# Altium PCB HalfBridgeDriverBoard.PcbDoc
Units mil, origin at the board's own origin, x right, y up, seen from the top; angles counter-clockwise.
Board outline 1900 x 2000 mil, 2 copper layers (Top Layer, Bottom Layer); 37 components, 22 nets, 126 pads, 49 vias.
Unrouted connection lines stored in the file: 6.
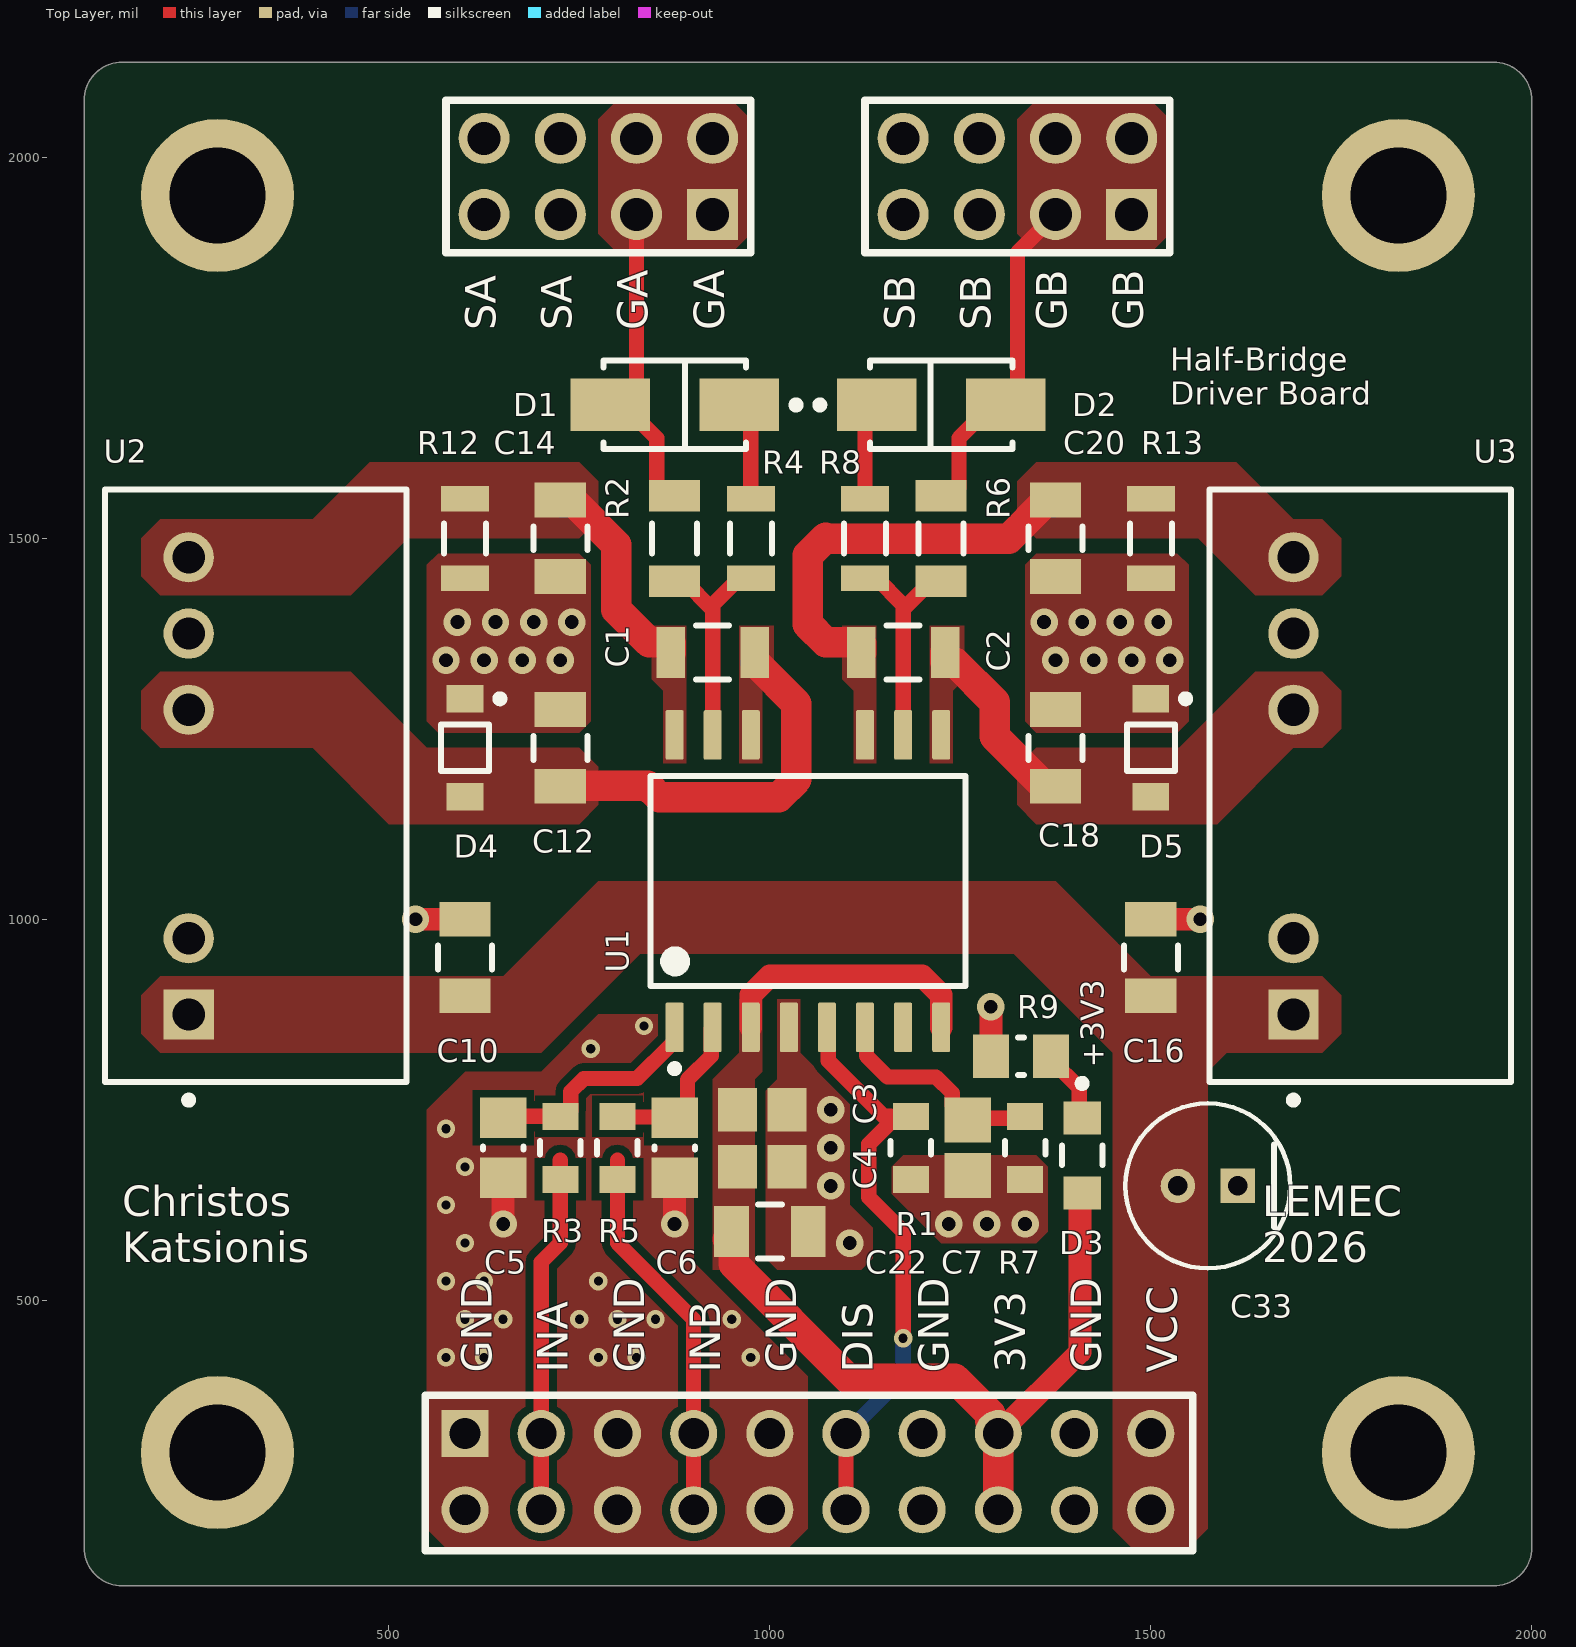
[diagram p0: Top Layer view]
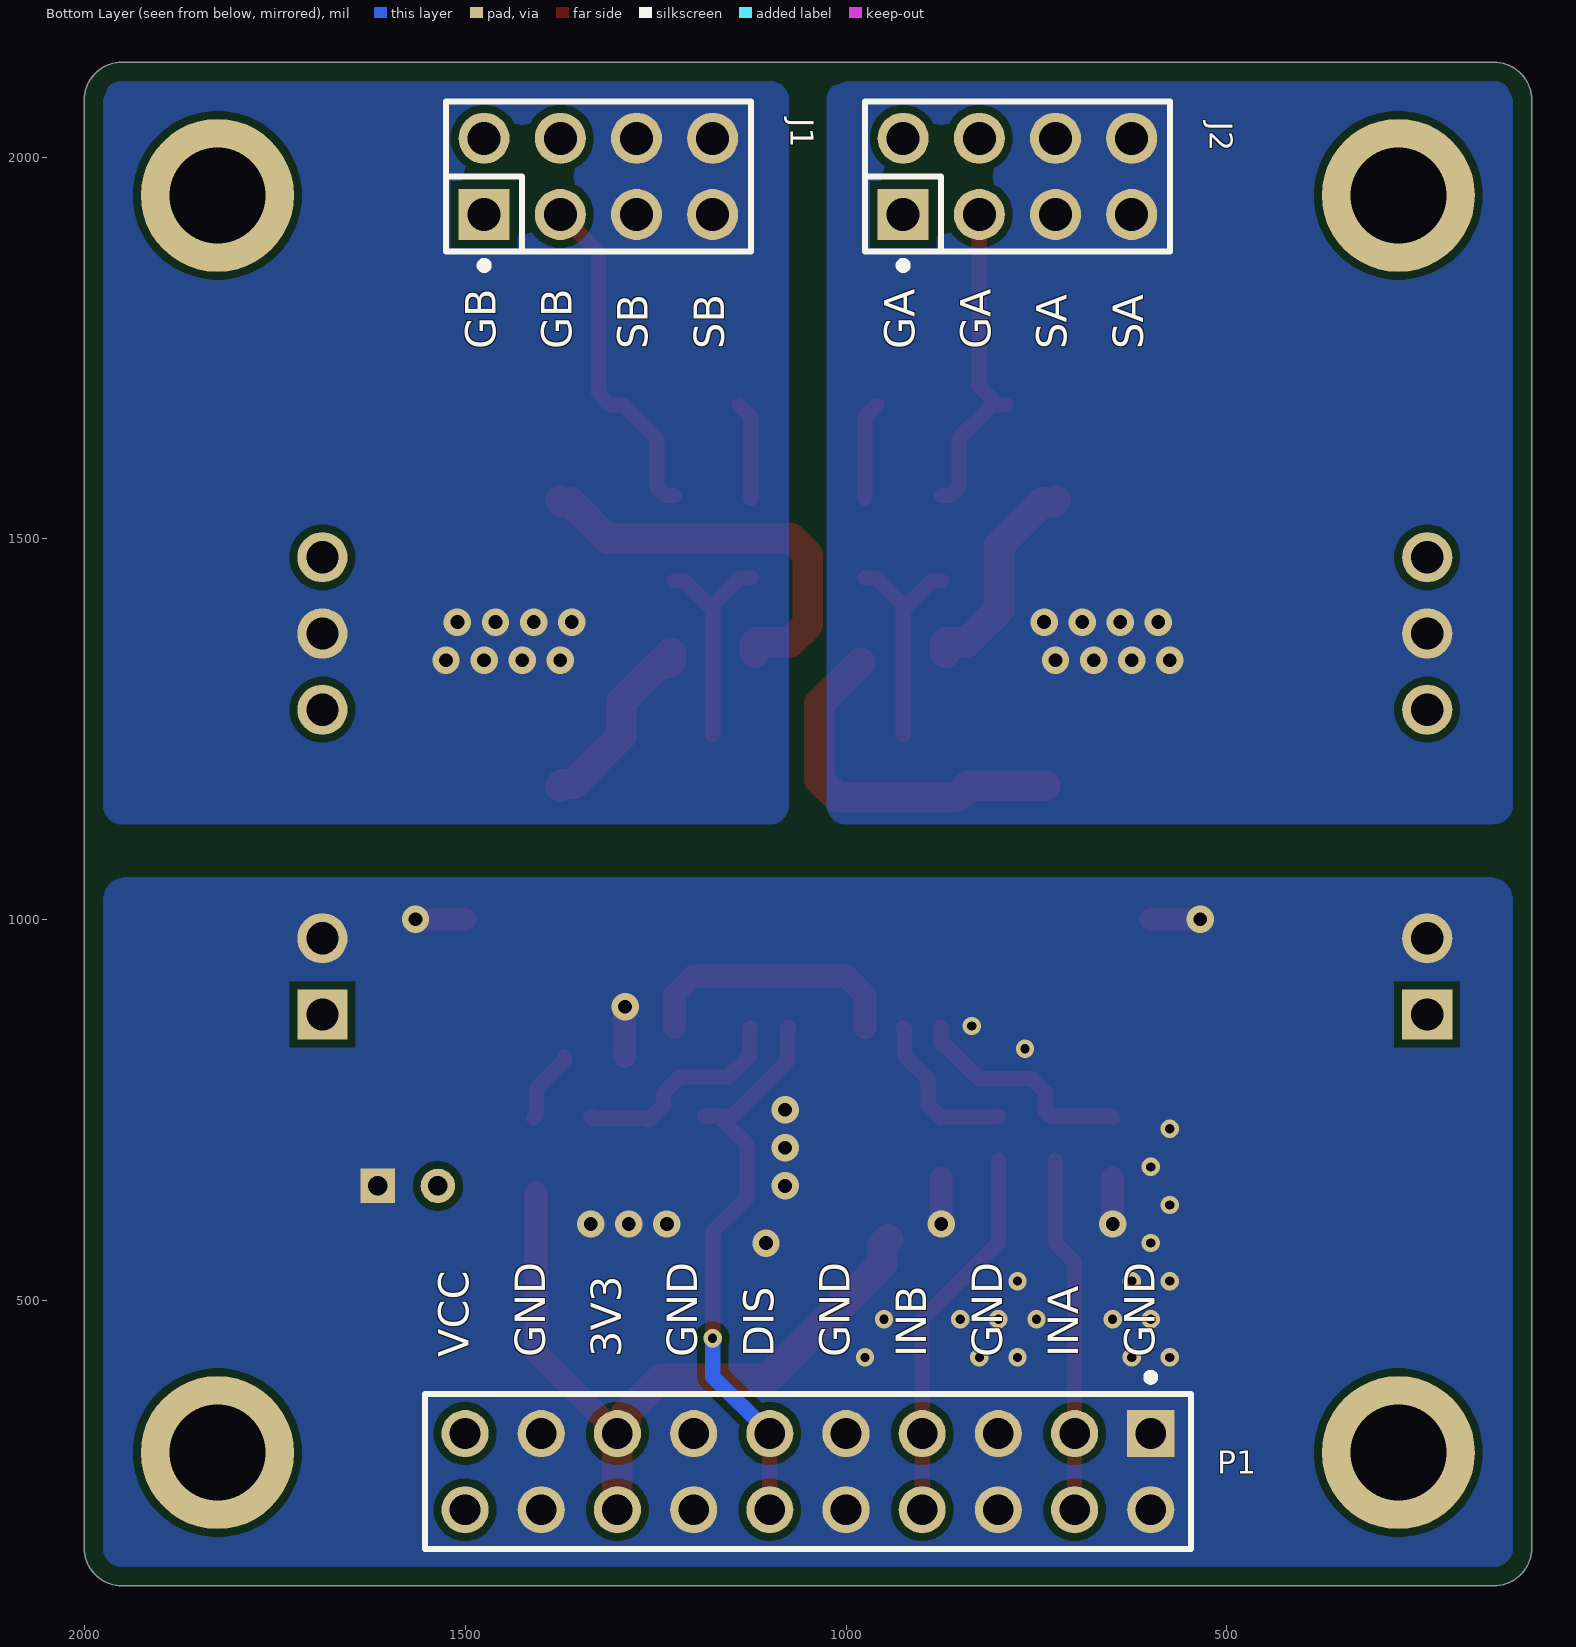
[diagram p1: Bottom Layer view, seen from below]
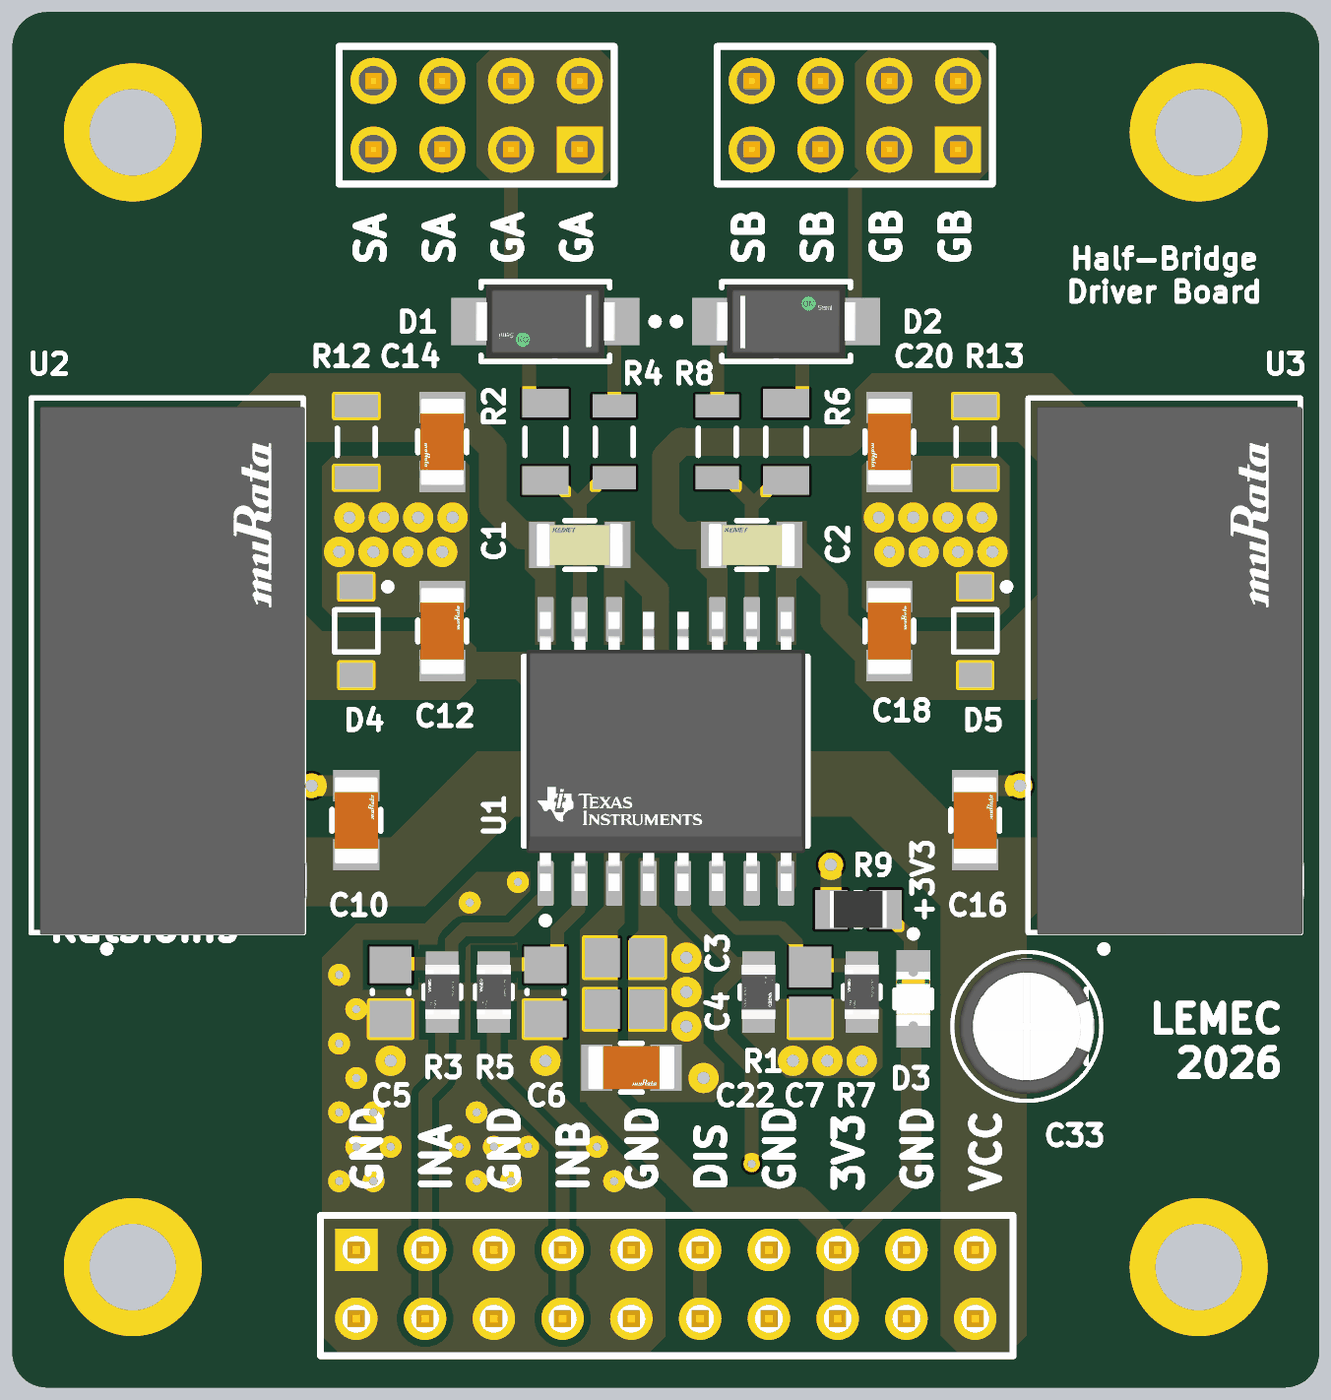
[diagram p2: 3D render of the assembled board from above, using the file's embedded part models]
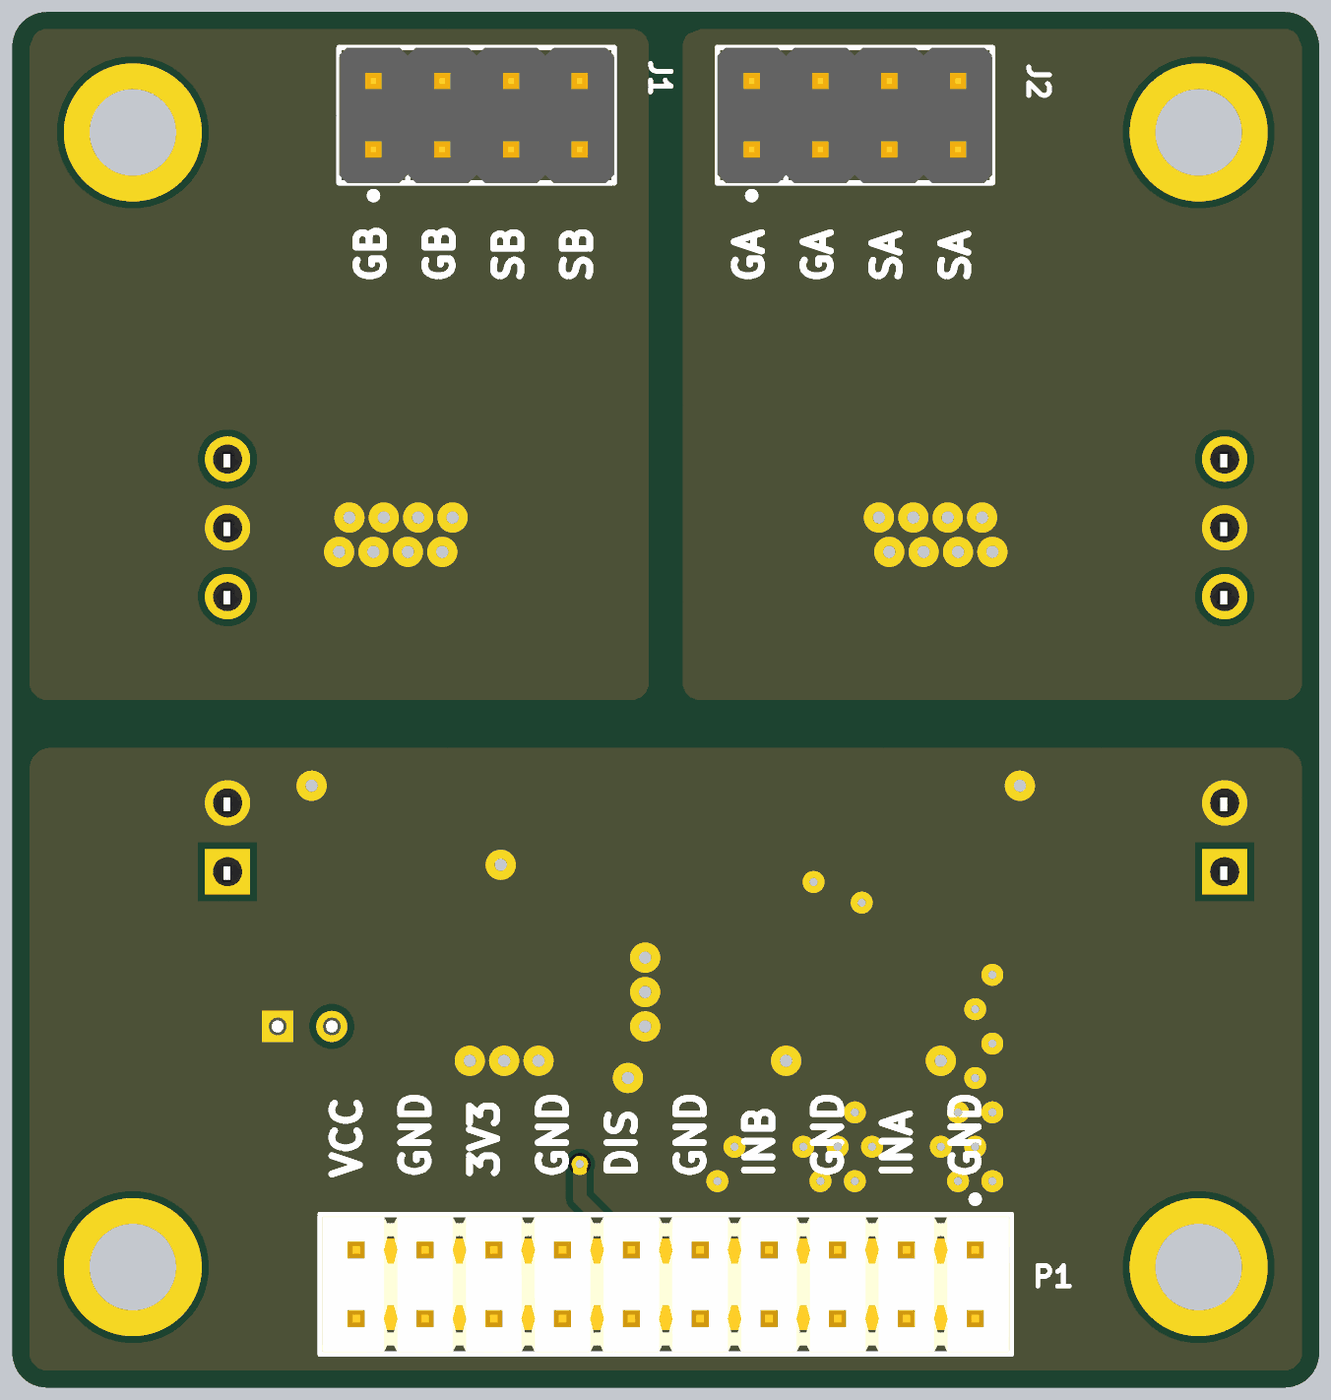
[diagram p3: 3D render of the assembled board from below, using the file's embedded part models]

## Layer stack, top to bottom
Top Solder: solder mask 0.4, Solder Resist, Dk 3.5
Top Layer: signal copper 1.4
Dielectric 1: dielectric 12.6, FR-4, Dk 4.8
Bottom Layer: signal copper 1.4
Bottom Solder: solder mask 0.4, Solder Resist, Dk 3.5

## Board outline
100,175 100,2075 cw(c150,2075) 150,2125 1950,2125 cw(c1950,2075) 2000,2075 2000,175 cw(c1950,175) 1950,125 150,125 cw(c150,175)

## Design rules (kind name [scope] priority, off if disabled: settings)
Clearance [All] p1: gap=10 ignorepadtopadclearanceinfootprint=FALSE
HoleSize [All] p1: absolutevalues=TRUE maxlimit=200 minlimit=1 maxpercent=80.000 minpercent=20.000
MinimumSolderMaskSliver [All] p1: minsoldermaskwidth=5
PolygonConnect PolygonConnectPowerRails [InNetClass('Power Rails')] p1: connectstyle=Direct reliefconductorwidth=10 reliefentries=4 polygonreliefangle="90 Angle" airgapwidth=10
PolygonConnect PolygonConnectPower [InNetClass('Main Power')] p2: connectstyle=Direct reliefconductorwidth=10 reliefentries=4 polygonreliefangle="90 Angle" airgapwidth=10
PolygonConnect [All] p3: connectstyle=Direct reliefconductorwidth=10 reliefentries=4 polygonreliefangle="90 Angle" airgapwidth=7
RoomDefinition U_Half_Bridge_1 [InComponentClass('U_Half_Bridge_1')] p1: confinementstyle=ConfineIn formatcopy=TRUE lockcomponents=FALSE outline 35,535 2035,535 2035,2635 35,2635
RoutingVias [All] p1: holewidth=12 width=24 viastyle="Through Hole" minholewidth=12 minwidth=24 maxholewidth=18 maxwidth=36
SilkToSolderMaskClearance [IsPad] p1: minsilkscreentomaskgap=6 clearancetoexposedcopper=TRUE
SolderMaskExpansion [All] p1: expansion=4 istentingtop=FALSE
SupplyNets "Schematic Supply Nets_9" [InNet('+3V3')] p1: voltage=0.000
SupplyNets "Schematic Supply Nets_7" [InNet('VCC')] p2: voltage=0.000
SupplyNets "Schematic Supply Nets_5" [InNet('GND')] p3: voltage=0.000
Width PowerRailsWidth [InNetClass('Power Rails')] p1: maxlimit=50 minlimit=30 preferedwidth=40 minimp=50.000000 maximp=50.000000 favimp=50.000000
Width DriverSignalsWidth [InNetClass('Driver Signals')] p2: maxlimit=20 minlimit=20 preferedwidth=20 minimp=50.000000 maximp=50.000000 favimp=50.000000
Width DriverPowerWidth [InNetClass('Driver Power')] p3: maxlimit=50 minlimit=30 preferedwidth=40 minimp=50.000000 maximp=50.000000 favimp=50.000000
Width [All] p4: maxlimit=20 minlimit=20 preferedwidth=20 minimp=50.000000 maximp=50.000000 favimp=50.000000
27 further rules are at their usual default settings.

## Classes and differential pairs
component class DriverModule: C22 C33 D3 J1 J2 P1 R9
net class "Power Rails": +3V3 GND VCC
net class "Driver Signals": NetD1_1 NetD2_1
net class "Driver Power": NetC12_2 NetC18_2 VDD_A VDD_B VSS_A VSS_B
component class U_Half_Bridge_1: C1 C2 C3 C4 C5 C6 C7 C10 C12 C14 C16 C18 C20 D1 D2 D4 D5 R1 R2 R3 R4 R5 R6 R7 R8 R12 R13 U1 U2 U3

## Components (designator, comment, footprint, x,y, rotation, side; value= is the part's Value field where it differs from the comment)
C1 "100n" FP-C1206C-EB-MFG 925,1350 r0 top value="0.10 μF"
C2 "100n" FP-C1206C-EB-MFG 1175,1350 r0 top value="0.10 μF"
C3 "0.1u" CAPC2013X145X48NL20T23 990,750 r180 top
C4 "0.1u" CAPC2013X145X48NL20T23 990,675 r180 top
C5 "330p" CAPC0805(2012)75_M 650,700 r90 top value=33pF
C6 "330p" CAPC0805(2012)75_M 875,700 r90 top value=33pF
C7 "1n" CAPC2013X145X48ML20T23 1260,700 r90 top
C10 "4.7u" FP-GRM31C-0_2-e0_3_0_8-IPC_C 600,949.77 r90 top
C12 "4.7u" FP-GRM31C-0_2-e0_3_0_8-IPC_C 725,1225 r90 top
C14 "4.7u" FP-GRM31C-0_2-e0_3_0_8-IPC_C 725,1500 r270 top
C16 "4.7u" FP-GRM31C-0_2-e0_3_0_8-IPC_C 1500,949.77 r90 top
C18 "4.7u" FP-GRM31C-0_2-e0_3_0_8-IPC_C 1375,1225 r90 top
C20 "4.7u" FP-GRM31C-0_2-e0_3_0_8-IPC_C 1375,1500 r270 top
C22 "4.7u" FP-GRM31C-0_2-e0_3_0_8-IPC_C 1000,590 r0 top
C33 "220u" FP-RAD-TH-D_5_0_5-L_7_1-F-MFG 1575,650 r180 top
D1 "SS14" FP-403AE-MFG 875,1675 r0 top
D2 "SS14" FP-403AE-MFG 1225,1675 r180 top
D3 "+3V3" FP-LTST-C171KGKT-MFG 1410,690 r270 top
D4 "MMSZ5230BT1G" ONSC-SOD-123-2-425-04_V 600,1225 r270 top
D5 "MMSZ5230BT1G" ONSC-SOD-123-2-425-04_V 1500,1225 r270 top
J1 "PR20204VBDN" FP-PR20204VBDN-MFG 1325,1975 r180 bottom
J2 "PR20204VBDN" FP-PR20204VBDN-MFG 775,1975 r180 bottom
P1 "HTSW-110-07-G-D" FP-HTSW-110-07-G-D-MFG 1050,275 r0 bottom
R1 "10K" FP-SR0805-MFG 1185,700 r270 top value=10KΩ
R2 "47R" RESC3116X65X40NL10T20 875,1500 r90 top
R3 "51R" FP-RT0805-MFG 725,700 r90 top value=51Ω
R4 "22R" RESC3116X65X40LL10T20 975,1500 r90 top
R5 "51R" FP-RT0805-MFG 800,700 r90 top value=51Ω
R6 "47R" RESC3116X65X40NL10T20 1225,1500 r90 top
R7 "100K" FP-RT0805-MFG 1335,700 r90 top value=100KΩ
R8 "22R" RESC3116X65X40LL10T20 1125,1500 r90 top
R9 "100R" RESC2013X60X35ML10T20 1330,820 r0 top
R12 "2K" RESC3116X65X40LL10T20 600,1500 r90 top
R13 "2K" RESC3116X65X40LL10T20 1500,1500 r90 top
U1 "UCC21540DWK" FP-DW0016B-MFG 1050,1050 r90 top
U2 "MGJ2D121505SC" FP-MGJ2D121505SC-MFG 325,1175 r90 top
U3 "MGJ2D121505SC" FP-MGJ2D121505SC-MFG 1775,1175 r90 top

## Footprints (in the part's own frame and the unit in brackets; to place one, negate y for a bottom-side part, rotate by r counter-clockwise, add the part's x,y. Pads: shape width x height; smd on the part's side, far side on the other; paste and mask are expansions set on the pad)
CAPC0805(2012)75_M [mm] "Chip Capacitor, Body 2.0x1.2mm, Height 0.75mm, IPC Low Density"
  rect 1.35x1.55 smd: 1(-1,0) 2(1,0)
  silkscreen extent -0.05,-0.67 0.05,0.67, body extent -1.1,-0.72 1.1,0.72, height 0.75
CAPC2013X145X48ML20T23 [mm] "Chip Capacitor, 2-Leads, Body 2.00x1.25mm, IPC Low Density"
  rect 1.5x1.55 smd: 1(-0.925,0) 2(0.925,0)
  body extent -1.1,-0.72 1.1,0.72, height 1.45
CAPC2013X145X48NL20T23 [mm] "Chip Capacitor, 2-Leads, Body 2.00x1.25mm, IPC Medium Density"
  rect 1.3x1.45 smd: 1(-0.825,0) 2(0.825,0)
  body extent -1.1,-0.72 1.1,0.72, height 1.45
FP-403AE-MFG [mm]
  rect 2.65x1.75 smd paste+0 mask+0: 1(-2.15,0) 2(2.15,0)
  silkscreen extent -2.37,-1.48 4.18,1.48, body extent -2.6,-1.36 2.6,1.36, height 2.5
FP-C1206C-EB-MFG [mm]
  rect 0.95x1.7 smd paste+0 mask+0: 1(-1.4,0) 2(1.4,0)
  silkscreen extent -0.55,-0.9 0.55,0.9, body extent -1.6,-0.8 1.6,0.8, height 0.88
FP-DW0016B-MFG [mm]
  rrect17% 1.65x0.6 smd paste+0 mask+0: 1(-4.875,4.445) 2(-4.875,3.175) 3(-4.875,1.905) 4(-4.875,0.635) 5(-4.875,-0.635) 6(-4.875,-1.905) 7(-4.875,-3.175) 8(-4.875,-4.445) 9(4.875,-4.445) 10(4.875,-3.175) 11(4.875,-1.905) 14(4.875,1.905) 15(4.875,3.175) 16(4.875,4.445)
  silkscreen extent -6.37,-5.25 3.5,5.25, body extent -5.8,-5.5 5.8,5.5, height 0.25
FP-GRM31C-0_2-e0_3_0_8-IPC_C [mil]
  rect 45.46x67.17 smd paste+0 mask+0: 1(-50.23,0) 2(50.23,0)
  silkscreen extent -16,-35 16,35, body extent -77,-39 77,39, height 10
FP-HTSW-110-07-G-D-MFG [mm]
  rect 1.57x1.57 hole 1.02 paste-2539.97 mask+0: 1(-11.43,-1.27)
  round 1.57 hole 1.02 paste-2539.97 mask+0: 2(-11.43,1.27) 3(-8.89,-1.27) 4(-8.89,1.27) 5(-6.35,-1.27) 6(-6.35,1.27) 7(-3.81,-1.27) 8(-3.81,1.27) 9(-1.27,-1.27) 10(-1.27,1.27) 11(1.27,-1.27) 12(1.27,1.27) 13(3.81,-1.27) 14(3.81,1.27) 15(6.35,-1.27) 16(6.35,1.27) 17(8.89,-1.27) 18(8.89,1.27) 19(11.43,-1.27) 20(11.43,1.27)
  silkscreen extent -12.76,-3.27 12.76,2.58, body extent -12.7,-2.52 12.7,2.51, height 8.71
FP-LTST-C171KGKT-MFG [mm]
  rect 1.1x1.25 smd paste+0 mask+0: 1(-1.25,0) 2(1.25,0)
  silkscreen extent -2.52,-0.67 0.33,0.67, body extent -1.9,-0.77 1.9,0.77, height 0.25
FP-MGJ2D121505SC-MFG [mm]
  rect 1.675x1.675 hole 1.075 paste-2539.97 mask+0: 1(-7.62,2.23)
  round 1.675 hole 1.075 paste-2539.97 mask+0: 2(-5.08,2.23) 5(2.54,2.23) 6(5.08,2.23) 7(7.62,2.23)
  silkscreen extent -10.6,-5.02 9.87,5.02, body extent -9.97,-5.13 9.97,5.13, height 0.25
FP-PR20204VBDN-MFG [mm]
  rect 1.7x1.7 hole 1.1 paste-2539.97 mask+0: 1(-3.81,-1.27)
  round 1.7 hole 1.1 paste-2539.97 mask+0: 2(-3.81,1.27) 3(-1.27,-1.27) 4(-1.27,1.27) 5(1.27,-1.27) 6(1.27,1.27) 7(3.81,-1.27) 8(3.81,1.27)
  silkscreen extent -5.08,-3.09 5.08,2.5, body extent -5.08,-2.5 5.08,2.5, height 8.4
FP-RAD-TH-D_5_0_5-L_7_1-F-MFG [mm]
  rect 1.15x1.15 hole 0.65 paste-2539.97 mask+0: 1(-1,0)
  round 1.15 hole 0.65 paste-2539.97 mask+0: 2(1,0)
  silkscreen extent -2.75,-2.75 2.75,2.75, body extent -2.85,-2.85 2.85,2.85, height 0.25
FP-RT0805-MFG [mm]
  rect 0.9x1.2 smd paste+0 mask+0: 1(-1.05,0) 2(1.05,0)
  silkscreen extent -0.23,-0.67 0.23,0.67, body extent -1,-0.63 1,0.63, height 0.6
FP-SR0805-MFG [mm]
  rect 0.9x1.2 smd paste+0 mask+0: 1(-1.05,0) 2(1.05,0)
  silkscreen extent -0.23,-0.67 0.23,0.67, body extent -1,-0.63 1,0.63, height 0.6
ONSC-SOD-123-2-425-04_V [mm] "SOD, 2-Leads, Body 2.69x1.6mm"
  rect 0.91x1.22 smd: 1(-1.635,0) 2(1.635,0)
  silkscreen extent -1.76,-0.8 0.78,1.29, body extent -1.35,-0.8 1.35,0.8, height 1.35
RESC2013X60X35ML10T20 [mm] "Chip Resistor, 2-Leads, Body 2.1x1.35mm, IPC Low Density"
  rect 1.2x1.45 smd: 1(-1,0) 2(1,0)
  silkscreen extent -0.1,-0.63 0.1,0.63, body extent -1.05,-0.68 1.05,0.67, height 0.6
RESC3116X65X40LL10T20 [mm] "Chip Resistor, 2-Leads, Body 3.10x1.60mm, IPC High Density"
  rect 0.85x1.6 smd: 1(-1.325,0) 2(1.325,0)
  silkscreen extent -0.5,-0.7 0.5,0.7, body extent -1.6,-0.85 1.6,0.85, height 0.65
RESC3116X65X40NL10T20 [mm] "Chip Resistor, 2-Leads, Body 3.10x1.60mm, IPC Medium Density"
  rect 1.05x1.7 smd: 1(-1.425,0) 2(1.425,0)
  silkscreen extent -0.5,-0.75 0.5,0.75, body extent -1.6,-0.85 1.6,0.85, height 0.65

## Part data
C1 C2: library part CMP-03020-006572-2, "C1206 0.10 μF X7R 20.00% 50 V", Capacitance="0.10 μF", Manufacturer=KEMET, Manufacturer Part Number=C1206C104M5RACAUTO, Package=C1206C-EB, Temperature="-55°C to +150°C", Temperature Characteristic=X7R, Temperature Coefficient=15%, Temperature Range High=+150°C, Temperature Range Low=-55°C, Tolerance=0.2, Voltage Rating="50 V", Automotive=Yes, Automotive Grade="Grade 0", Category=Cap, ComponentLink2Description=Datasheet, ComponentLink2URL=https://content.kemet.com/datasheets/KEM_C1007_X8R_ULTRA_150C_SMD.pdf, Device Class L1="Passive Components", Device Class L2=Capacitors, Device Class L3="Ceramic Capacitors", Height=0.88mm, Ipc Land Pattern Name=CAPC320160X78, Lead Free=Yes, Material=Ceramic, Octopart=https://octopart.com/c1206c104m5racauto-kemet-82343739, RoHS=TRUE
C3 C4: library part CMP-2007-01705-1, Manufacturer=Vitramon, Part Number=VJ0805Y104KXAMR
C5 C6: library part CMP-1036-01439-1, "CAP 33pF 100V ±2% 0805 (2012 Metric) Thickness 0.75mm SMD", Case-EIA=0805, Case-Metric=2012, Rated Voltage="100 V", Tolerance=Â±2%, Max Thickness="0.75 mm", Technology=SMT
C7: library part CMP-2007-03154-1, Manufacturer=Vitramon, Part Number=VJ0805Y102KXAMC
C10 C12 C14 C16 C18 C20 C22: library part CMP-06035-057352-1, "Chip Multilayer Ceramic Capacitors for General Purpose, 1206, 4.7uF, X7R, 15%, 20%, 50V", Capacitance=4.7uF, Case Code (Imperial)=1206, Case Code (Metric)=3216, Dielectric=X7R, Max Operating Temperature=125°C, Min Operating Temperature=-55°C, Package Quantity=2000, Tolerance=20%, Voltage Rating=50V, Case/Package=1206, Depth=1.6mm, Height=1.6mm, Lead Free="Lead Free", Length=3.2mm, Mount="Surface Mount", Packaging="Tape and Reel", Radiation Hardening=No, Termination=SMD/SMT, Thickness=0.071inch, Voltage Rating (DC)=50V, Width=0.063inch
C33: library part CMP-05427-001207-1, "Aluminum Electrolytic Capacitors (Radial Lead Type) 22uF ±20% 25V", Capacitance=22uF, Case/Package=Radial, Max Operating Temperature=85°C, Min Operating Temperature=-40°C, Package Quantity=2000, Ripple Current=55mA, Tolerance=20%, Voltage Rating=25V, Diameter=5mm, Height=7mm, Height - Seated (Max)=0.315inch, Lead Pitch=2.5mm, Length=7mm, Life (Hours)=1000Hour, Mount="Through Hole", Packaging="Ammo Pack", Radiation Hardening=No, RoHS Compliant=Yes, Series=KA, Termination=Radial, Voltage Rating (DC)=25V
D1 D2: library part CMP-2000-04943-2, "DIODE SCHOTTKY 40V 1A SMA", Forward Current=1A, Manufacturer="ON Semiconductor", Max Junction Temp=+125°C, Max Repetitive Reverse Voltage=40V, Max Surge Forward Current=40A, Package=403AE, Peak Reverse Current=0.2mA, Temperature="-65°C to +125°C", Temperature Range Low=-65°C, Automotive=No, Category=Diode, ComponentLink2Description=Datasheet, ComponentLink2URL=https://www.onsemi.com/pub/Collateral/SS19-D.PDF, Device Class L1="Discrete Semiconductors", Device Class L2=Diodes, Device Class L3="Schottky Diodes", Digikey Description="DIODE SCHOTTKY 40V 1A SMA", Height=2.5mm, Lead Free=Yes, Manufacturer Part Number=SS14, Mouser Description="Schottky Diodes & Rectifiers SMA 40V 1.0A", Octopart=https://octopart.com/ss14-on+semiconductor-29205033, RoHS=TRUE, Standoff Height=0.05mm, Temperature Range High=+125°C
D3: library part CMP-22017-000037-1, "LED GREEN CLEAR SMD", Case Code (Imperial)=0805, Case Code (Metric)=2012, Color=Green, Forward Current=30mA, Forward Voltage=2.4V, Lens Color=Colorless, Max Operating Temperature=85°C, Min Operating Temperature=-55°C, Package Quantity=1, Power Dissipation=75mW, Reverse Voltage=5V, Test Current=20mA, Case/Package=0805, Depth=1.25mm, Dominant Wavelength=571nm, Height=0.8mm, Illumination Color=Green, Lead Free="Lead Free", Length=2mm, Lens Style=Rectangular, Lens Transparency=Clear, Luminous Intensity=35mcd, Mount="Surface Mount", Number of Elements=1, Number of LEDs=1, Number of Pins=2, Packaging="Tape and Reel", Power Rating=75mW, Radiation Hardening=No, Viewing Angle=130°, Wavelength=574nm, Width=1.25mm
D4 D5: library part CMP-1060-00571-1, "Zener Voltage Regulator, 500 mW, 2-Pin SOD-123, Pb-Free, Tape and Reel", Manufacturer="On Semiconductor", ComponentLink1Description="Manufacturer URL", ComponentLink1URL=http://www.onsemi.com/, ComponentLink2Description=Datasheet, ComponentLink2URL=http://www.onsemi.com/pub_link/Collateral/MMSZ5221BT1-D.PDF, ComponentLink3Description="Package Specification", ComponentLink3URL=http://www.onsemi.com/pub_link/Collateral/425-04.PDF, DatasheetVersion="Rev. 12", Mounting Technology="Surface Mount", P Max (W)=0.5, PackageDescription="2-Pin SOD, Body 1.6 x 2.69 mm", PackageReference=SOD-123-2-425-04, PackageVersion="Rev. G, 10/2009", Packing="Tape and Reel", PartNumber=MMSZ5230BT1G, RoHS=Pb-Free, VZ Typ (V)=4.7
J1 J2: library part CMP-77940-000004-1, "PIN HEADER, THR, DUAL ROW, .100\""
P1: library part CMP-02766-001761-1, "CONN HEADER VERT 20POS 2.54MM", Color=Natural, Max Current Rating=7.6A, Max Operating Temperature=125°C, Max Voltage Rating (AC)=550V, Min Operating Temperature=-55°C, Package Quantity=1, Connector Type="Male Pin", Contact Material=Bronze, Contact Mating Length=0.23inch, Contact Plating=Gold, Contact Type="Male Pin", Depth=5.02mm, Gender=Male, Housing Color=Natural, Housing Material=Polymer, Length=25.4mm, Mount="Through Hole", Number of Contacts=20, Number of Positions=20, Number of Rows=2, Orientation=Straight, Packaging=Bulk, Pitch=0.1inch, Reach SVHC Compliant=Yes, RoHS Compliant=Yes, Row Spacing=0.1inch, Series=HTSW, Termination=Solder
R1: library part CMP-03412-008440-1, "RES SMD 10K OHM 1% 1/8W 0805", Manufacturer=Yageo, Manufacturer Part Number=SR0805FR-0710KL, Package=SR0805, Power Rating=0.125W, Resistance=10KΩ, Temperature="-55°C to +155°C", Temperature Range High=+155°C, Temperature Range Low=-55°C, Tolerance=0.01, Voltage Rating=150V, Automotive=Yes, Automotive Grade="Grade 0", Category=Res, ComponentLink2Description=Datasheet, ComponentLink2URL=http://www.yageo.com/documents/recent/PYu-SR_D_F%20tol_RoHS_L_3.pdf, Composition="Thick Film", Device Class L1="Passive Components", Device Class L2=Resistors, Device Class L3="Chip SMD Resistors", Digikey Description="RES SMD 10K OHM 1% 1/8W 0805", Footprint Url=http://www.yageo.com/exep/pages/download/literatures/PYu-R_Mount_10.pdf, Height=0.6mm, Ipc Land Pattern Name=RESC200125X50, Lead Free=Yes, Octopart=https://octopart.com/sr0805fr-0710kl-yageo-71414332, RoHS=TRUE, Series=SR
R2 R6: library part CMP-2003-04943-1, Manufacturer=Yageo, Part Number=RC1206FR-1047RL
R3 R5: library part CMP-03412-015517-1, "RES SMD 51 OHM 1% 1/8W 0805", Manufacturer=Yageo, Manufacturer Part Number=RT0805FRD0751RL, Package=RT0805, Power Rating=0.125W, Resistance=51Ω, Temperature="-55°C to +155°C", Temperature Coefficient="25 ppm/°C", Temperature Range High=+155°C, Temperature Range Low=-55°C, Tolerance=0.0001, Voltage Rating=150V, Automotive=No, Category=Res, ComponentLink2Description=Datasheet, ComponentLink2URL=http://www.yageo.com/documents/recent/PYu-RT_1-to-0.01_RoHS_L_9.pdf, Composition="Thin Film", Device Class L1="Passive Components", Device Class L2=Resistors, Device Class L3="Chip SMD Resistors", Digikey Description="RES SMD 51 OHM 1% 1/8W 0805", Footprint Url=http://www.yageo.com/exep/pages/download/literatures/PYu-R_Mount_10.pdf, Height=0.6mm, Ipc Land Pattern Name=RESC200125X50, Lead Free=Yes, Octopart=https://octopart.com/rt0805frd0751rl-yageo-71400104, RoHS=TRUE, Series=RT
R4 R8: library part CMP-2003-04942-1, Manufacturer=Yageo, Part Number=RC1206FR-1022RL
R7: library part CMP-03412-003710-1, "RES SMD 100K OHM 0.1% 1/8W 0805", Manufacturer=Yageo, Manufacturer Part Number=RT0805BRC07100KL, Package=RT0805, Power Rating=0.125W, Resistance=100KΩ, Temperature="-55°C to +155°C", Temperature Coefficient="15 ppm/°C", Temperature Range High=+155°C, Temperature Range Low=-55°C, Tolerance=0.0025, Voltage Rating=150V, Automotive=No, Category=Res, ComponentLink2Description=Datasheet, ComponentLink2URL=http://www.yageo.com/documents/recent/PYu-RT_1-to-0.01_RoHS_L_9.pdf, Composition="Thin Film", Device Class L1="Passive Components", Device Class L2=Resistors, Device Class L3="Chip SMD Resistors", Digikey Description="RES SMD 100K OHM 0.1% 1/8W 0805", Footprint Url=http://www.yageo.com/exep/pages/download/literatures/PYu-R_Mount_10.pdf, Height=0.6mm, Ipc Land Pattern Name=RESC200125X50, Lead Free=Yes, Octopart=https://octopart.com/rt0805brc07100kl-yageo-20648691, RoHS=TRUE, Series=RT
R9: library part CMP-2100-03669-1, "Chip Resistor, 100 Ohm, +/-1%, 0.125 W, -55 to 155 degC, 0805 (2012 Metric), RoHS, Tape and Reel", Case Code (Imperial)=0805, Case Code (Metric)=2012, Manufacturer=Yageo, Max Operating Temperature=155degC, Max Power Dissipation=125mW, Min Operating Temperature=-55degC, Package Description="2-Pin Surface Mounted Device, Body 2 x 1.25 mm", Package Quantity=1, Resistance=100Ohm, Temperature Coefficient=100ppm/degreesC, Tolerance=1%, Voltage Rating=150V, Case/Package=0805, Composition=ThickFilm, Datasheet URL=http://www.yageo.com/NewPortal/yageodocoutput?fileName=/pdf/R-Chip/PYu-RC_Group_51_RoHS_L_5.pdf, Datasheet Version="Rev. 5, 10/2016", Depth=1.25mm, Height=0.024inch, Lead Free=LeadFree, Lead Pitch=0.4mm, Length=2mm, Manufacturer URL=http://www.yageo.com/, Military Standard=Not, Number of Pins=2, Number of Terminations=2, Package Reference=0805, Packaging=TapeandReel, Power Rating=125mW, REACH SVHC=Unknown, RoHSCompliant=true, Termination=SMD/SMT, Voltage Rating (DC)=150V, Width=0.049inch
R12 R13: library part CMP-2003-04030-1, Manufacturer=Yageo, Part Number=RC1206JR-132KL
U1: library part CMP-04912-000086-1, "DGTL ISO 5.7KV GATE DRVR 16SOIC", Case/Package=SOIC, High Level Output Current=6A, Low Level Output Current=4A, Max Operating Temperature=125°C, Min Operating Temperature=-40°C, Working Voltage=2.121kV, Approvals=CSA, Mount="Surface Mount", Number of Channels=2, Number of Pins=16, Packaging="Tape and Reel", Propagation Delay=30ns, Pulse Width Distortion (PWD)=5ns, RoHS Compliant=Yes
U2 U3: library part CMP-20596-000010-1, "DC DC CONVERTER 15V -5V 2W", Case/Package=SIP, Current - Output 1=80mA, Current - Output 2=40mA, Isolation Voltage=5.2kV, Max Input Voltage=13.2V, Max Operating Temperature=100°C, Max Output Power=2W, Max Power Dissipation=1W, Min Input Voltage=10.8V, Min Operating Temperature=-40°C, Nominal Input Voltage=12V, Output Voltage=15V, Package Quantity=25, Voltage - Output 2=-5V, Depth=19.65mm, Efficiency=80%, Features=SCP, Height=0.5inch, Length=0.77inch, Max Input Voltage (DC)=13.2V, Max Output Current=40mA, Min Input Voltage (DC)=10.8V, Mount="Through Hole", Number Of Outputs=2, Number of Pins=5, Output Current=80mA, Output Power=2W, Packaging=Rail/Tube, Radiation Hardening=No, REACH SVHC="No SVHC", RoHS Compliant=Yes, Voltage - Output 1=15V, Weight=0.151678oz, Width=0.39inch

## Free pads (board coordinates)
  round 200.76 hole 125.98 paste-99999 mask+0: 11(275,300) 11(275,1950) 11(1825,300) 11(1825,1950)

## Via types
v1: diameter 36, hole 18, Top Layer to Bottom Layer, 28 vias
v2: diameter 24, hole 12, Top Layer to Bottom Layer, 21 vias

## Nets (pads, with @x,y where several pads share a name; then routed paths per layer and width w, separated by ;. In a path a pad name is that pad's centre, name@x,y a point inside that pad or via, vN(x,y) a via of type N, cw(c..) or ccw(c..) an arc to the next point about the centre after c; other vN are vias at no path point)
+3V3: C3.2 C4.2 C22.1 D3.2 P1.15 P1.16 U1.3 U1.8 | length 1293
  Top Layer w30: U1.3 975,900.68 999.87,925.55 1200.13,925.55 1225,900.68 U1.8 ; P1.15 1407.05,432.05 D3.2@1407.05,640.79
  Top Layer w40: C22.1@944.77,580 C22.1@947.5,577.27 ; C22.1@952.5,572.27 952.5,547.5 1103,397 1243,397 1289.09,350.91 1289.09,341.81 1300,330.9 P1.15 P1.16
GND: C3.1 C4.1 C5.1 C6.1 C7.1 C10.2 C16.2 C22.2 C33.1 P1.1 P1.2 P1.5 P1.6 P1.9 P1.10 P1.13 P1.14 P1.17 P1.18 R1.2 R7.1 R9.1 U1.4 U2.2 U3.2 | length 316.5
  Top Layer w30: v1(535,1000) C10.2 ; v1(650,600) C5.1 ; v1(875,600) C6.1 ; v1(1290,885) 1290.31,884.69 1290.31,820.32 R9.1 ; C16.2 v1(1565,1000)
  other v1: 1105,575 1235,600 1285,600 1335,600 1080,650 1080,700 1080,750
  other v2: 575,425 625,425 775,425 825,425 975,425 600,475 650,475 750,475 800,475 850,475 950,475 575,525 625,525 775,525 600,575 575,625 600,675 575,725 765,830 835,860
NetC5_2: C5.2 R3.2 U1.1 | length 300.7
  Top Layer w20: C5.2 651.97,741.34 730.91,741.34 738.62,749.06 738.62,773.62 755.94,790.94 825.94,790.94 870.59,835.59 873.19,835.59 875,837.4 U1.1
NetC6_2: C6.2 R5.2 U1.2 | length 215.4
  Top Layer w20: R5.2 800.98,740.35 874.02,740.35 C6.2 875.37,739.37 891.94,755.94 891.94,789.47 923.19,820.72 923.19,856.26 U1.2
NetC7_2: C7.2 R7.2 U1.6 | length 292.5
  Top Layer w20: U1.6 1126.81,856.26 1126.81,820.72 1154.62,792.91 1218.28,792.91 1239.49,771.71 1239.49,755.94 1259.02,736.42 C7.2 1262.46,738.88 1332.54,738.88 R7.2
NetC12_2: C12.2 C14.2 D4.1 J2.5 J2.6 J2.7 J2.8 R12.1 U2.6
  other v1: 575,1340 625,1340 675,1340 725,1340 590,1390 640,1390 690,1390 740,1390
NetC18_2: C18.2 C20.2 D5.1 J1.5 J1.6 J1.7 J1.8 R13.1 U3.6
  other v1: 1375,1340 1425,1340 1475,1340 1525,1340 1360,1390 1410,1390 1460,1390 1510,1390
NetD1_1: D1.1 J2.1 J2.2 J2.3 J2.4 R2.2 | length 442.2
  Top Layer w20: J2.3 825,1699.45 800.55,1675 D1.1 808.07,1675 851.54,1631.54 851.54,1566.77 862.2,1556.1 R2.2
NetD1_2: D1.2 R4.2 | length 129.2
  Top Layer w20: D1.2 975,1659.65 R4.2
NetD2_1: D2.1 J1.1 J1.2 J1.3 J1.4 R6.2 | length 448.9
  Top Layer w20: R6.2 1237.8,1556.1 1248.46,1566.77 1248.46,1631.54 1291.93,1675 D2.1 1325,1690.35 1325,1875 J1.3
NetD2_2: D2.2 R8.2 | length 129.2
  Top Layer w20: R8.2 1125,1659.65 D2.2
NetD3_1: D3.1 R9.2 | length 97.6
  Top Layer w20: R9.2 1369.37,815.08 1406.2,778.24 1406.2,743.01 D3.1
NetP1_3: P1.3 P1.4 R3.1 | length 469
  Top Layer w20: P1.4 P1.3 700,550 725,575 725,683.66
NetP1_7: P1.7 P1.8 R5.1 | length 500.1
  Top Layer w20: 800,683.66 R5.1 800,575 900,475 P1.7 P1.8
NetP1_11: P1.11 P1.12 R1.1 U1.5 | length 767.8
  Top Layer w20: U1.5 1076.81,856.26 1076.81,814.15 1149.62,741.34 1158.66,741.34 ; P1.12 P1.11 P1.11@1100,336.31 ; v2(1175,450) 1175,590 1130,635 1130,705 1166.34,741.34 R1.1
  Bottom Layer w20: P1.11 1175,400 v2(1175,450)
NetR2_1: R2.1 R4.1 U1.15 | length 300.7
  Top Layer w20: R2.1 887.8,1443.9 925,1406.69 ; U1.15 925,1406.69 ; R4.1 960.24,1447.83 925,1412.6 925,1406.69
NetR6_1: R6.1 R8.1 U1.10 | length 300.7
  Top Layer w20: R8.1 1139.76,1447.83 1175,1412.6 1175,1406.69 ; U1.10 1175,1406.69 ; R6.1 1212.2,1443.9 1175,1406.69
VCC: C10.1 C16.1 C33.2 P1.19 P1.20 U2.1 U3.1
VDD_A: C1.1 C14.1 R12.2 U1.16 U2.7 | length 284.7
  Top Layer w40: C14.1 727.73,1547.5 742.5,1547.5 798.59,1491.41 798.59,1406.41 841.54,1363.46 868.58,1363.46 869.88,1362.17 C1.1
VDD_B: C2.1 C20.1 R13.2 U1.11 U3.7 | length 534.2
  Top Layer w30: 1073.29,1500.92 1074.2,1500
  Top Layer w40: 1073.29,1500.92 1050,1477.63 1050,1386.9 1073.43,1363.46 1118.58,1363.46 1119.88,1362.17 C2.1 ; 1079.01,1499.57 1313.48,1499.57 1361.41,1547.5 1372.27,1547.5 C20.1
VSS_A: C1.2 C12.1 D4.2 U1.14 U2.5 | length 487.6
  Top Layer w40: C12.1@738.59,1175 840,1175 855,1160 1011.57,1160 1035,1183.43 1035,1282.95 C1.2@981.42,1336.54
VSS_B: C2.2 C18.1 D5.2 U1.9 U3.5 | length 251
  Top Layer w40: C2.2 1230.12,1337.83 1231.42,1336.54 1243.58,1336.54 1295,1285.12 1295,1240 1357.5,1177.5 1372.27,1177.5 C18.1
pads on no net: U1.7

## Polygon pours and split planes (outlines as drawn)
GND on Top Layer "GND_L01_P105" (solid, pour order 105): 900,875 775,875 700,800 600,800 550,750 550,200 575,175 1025,175 1050,200 1050,400 900,550
NetC18_2 on Top Layer "NETC18_2_L01_P099" (solid, pour order 99): 1535,1480 1350,1480 1335,1465 1335,1260 1350,1245 1535,1245 1550,1260 1550,1465
+3V3 on Top Layer "+3V3_L01_P094" (solid, pour order 94): 990,800 980,790 980,540 925,540 925,790 960,825 960,895 990,895 990,825
GND on Top Layer "Top Layer-GND" (solid, pour order 101): 995,555 1010,540 1120,540 1135,555 1135,595 1105,625 1105,760 1085,780 1040,825 1040,895 1010,895 1010,790 995,775
VCC on Top Layer "Top Layer-VCC" (solid, pour order 104): 1475,175 1550,175 1575,200 1575,800 1600,825 1725,825 1750,850 1750,900 1725,925 1500,925 1375,1050 775,1050 650,925 200,925 175,900 175,850 200,825 700,825 830,955 1320,955 1450,825 1450,200
GND on Top Layer "GND_L01_P102" (solid, pour order 102): 1160,640 1225,575 1350,575 1365,590 1365,675 1350,690 1175,690 1160,675
NetC12_2 on Top Layer "NETC12_2_L01_P098" (solid, pour order 98): 565,1480 750,1480 765,1465 765,1260 750,1245 565,1245 550,1260 550,1465
NetD1_1 on Top Layer "NETD1_1_L01_P097" (solid, pour order 97): 775,2050 775,1900 800,1875 950,1875 975,1900 975,2050 950,2075 800,2075
NetD2_1 on Top Layer "NETD2_1_L01_P096" (solid, pour order 96): 1325,2050 1325,1900 1350,1875 1500,1875 1525,1900 1525,2050 1500,2075 1350,2075
VDD_A on Top Layer "VDD_A_L01_P091" (solid, pour order 91): 890,1205 860,1205 860,1300 845,1315 845,1385 890,1385
VSS_A on Top Layer "VSS_A_L01_P090" (solid, pour order 90): 960,1385 960,1205 990,1205 990,1300 1005,1315 1005,1385
VDD_B on Top Layer "VDD_B_L01_P089" (solid, pour order 89): 1140,1205 1110,1205 1110,1300 1095,1315 1095,1385 1140,1385
VSS_B on Top Layer "VSS_B_L01_P088" (solid, pour order 88): 1210,1385 1210,1205 1240,1205 1240,1300 1255,1315 1255,1385
VSS_B on Top Layer "VSS_B_L01_P087" (solid, pour order 87): 1750,1250 1750,1300 1725,1325 1637.2,1325 1537.2,1225 1350,1225 1325,1200 1325,1150 1350,1125 1587.2,1125 1687.2,1225 1725,1225
VSS_A on Top Layer "VSS_A_L01_P086" (solid, pour order 86): 175,1250 175,1300 200,1325 450,1325 550,1225 750,1225 775,1200 775,1150 750,1125 500,1125 400,1225 200,1225
VDD_B on Top Layer "VDD_B_L01_P085" (solid, pour order 85): 1750,1500 1750,1450 1725,1425 1637.2,1425 1562.2,1500 1350,1500 1325,1525 1325,1575 1350,1600 1612.2,1600 1687.2,1525 1725,1525
VDD_A on Top Layer "VDD_A_L01_P084" (solid, pour order 84): 175,1500 175,1450 200,1425 450,1425 525,1500 750,1500 775,1525 775,1575 750,1600 475,1600 400,1525 200,1525
GND on Bottom Layer "GND" (solid, pour order 13): 155,1055 1945,1055 cw(c1945,1025) 1975,1025 1975,175 cw(c1950,175) 1950,150 150,150 cw(c150,175) 125,175 125,1025 cw(c155,1025)
NetC12_2 on Bottom Layer "NETC12_2_L02_P092" (solid, pour order 92): 125,2075 125,1150 ccw(c150,1150) 150,1125 1000,1125 ccw(c1000,1150) 1025,1150 1025,2075 ccw(c1000,2075) 1000,2100 150,2100 ccw(c150,2075)
NetC18_2 on Bottom Layer "NETC18_2_L02_P093" (solid, pour order 93): 1975,2075 1975,1150 cw(c1950,1150) 1950,1125 1100,1125 cw(c1100,1150) 1075,1150 1075,2075 cw(c1100,2075) 1100,2100 1950,2100 cw(c1950,2075)

## Silkscreen, mask and mechanical layers (free items; w line width, h text height)
Top Overlay:
  lines w10: 548,171 1555,171 1555,375 548,375 548,171 ; 575,1875 975,1875 975,2075 575,2075 575,1875 ; 1125,1875 1525,1875 1525,2075 1125,2075 1125,1875
  text "SA" at 640,1773.35 h40 r90
  text "SA" at 740,1773.35 h40 r90
  text "GA" at 840,1773.35 h40 r90
  text "GA" at 940,1773.35 h40 r90
  text "SB" at 1190,1773.35 h40 r90
  text "SB" at 1290,1773.35 h40 r90
  text "GB" at 1390,1773.35 h40 r90
  text "GB" at 1490,1773.35 h40 r90
  text "Half-Bridge / Driver Board" at 1525.58,1675 h30
  text "+3V3" at 1438,805.02 h30 r90
  text "Christos / Katsionis" at 150,550 h40
  text "LEMEC  / 2026" at 1646.09,550 h40
  text "GND" at 635,405 h40 r90
  text "INA" at 735,405 h40 r90
  text "GND" at 835,405 h40 r90
  text "INB" at 935,405 h40 r90
  text "GND" at 1035,405 h40 r90
  text "DIS" at 1135,405 h40 r90
  text "GND" at 1235,405 h40 r90
  text "3V3" at 1335,405 h40 r90
  text "GND" at 1435,405 h40 r90
  text "VCC" at 1535,405 h40 r90
Bottom Overlay:
  text "SA" at 610,1748.35 h40 r270
  text "SA" at 710,1748.35 h40 r270
  text "GA" at 810,1748.35 h40 r270
  text "GA" at 910,1748.35 h40 r270
  text "SB" at 1160,1748.35 h40 r270
  text "SB" at 1260,1748.35 h40 r270
  text "GB" at 1360,1748.35 h40 r270
  text "GB" at 1460,1748.35 h40 r270
  text "GND" at 595,425 h40 r270
  text "INA" at 695,425 h40 r270
  text "GND" at 795,425 h40 r270
  text "INB" at 895,425 h40 r270
  text "GND" at 995,425 h40 r270
  text "DIS" at 1095,425 h40 r270
  text "GND" at 1195,425 h40 r270
  text "3V3" at 1295,425 h40 r270
  text "GND" at 1395,425 h40 r270
  text "VCC" at 1495,425 h40 r270
Mechanical 1:
  the board outline again, w10